# Altium PCB measurement_rev4.PcbDoc
Units mil, origin at the board's own origin, x right, y up, seen from the top; angles counter-clockwise.
Board outline 3939.96 x 3929 mil, 2 copper layers (Top Layer, Bottom Layer); 129 components, 97 nets, 440 pads, 205 vias.
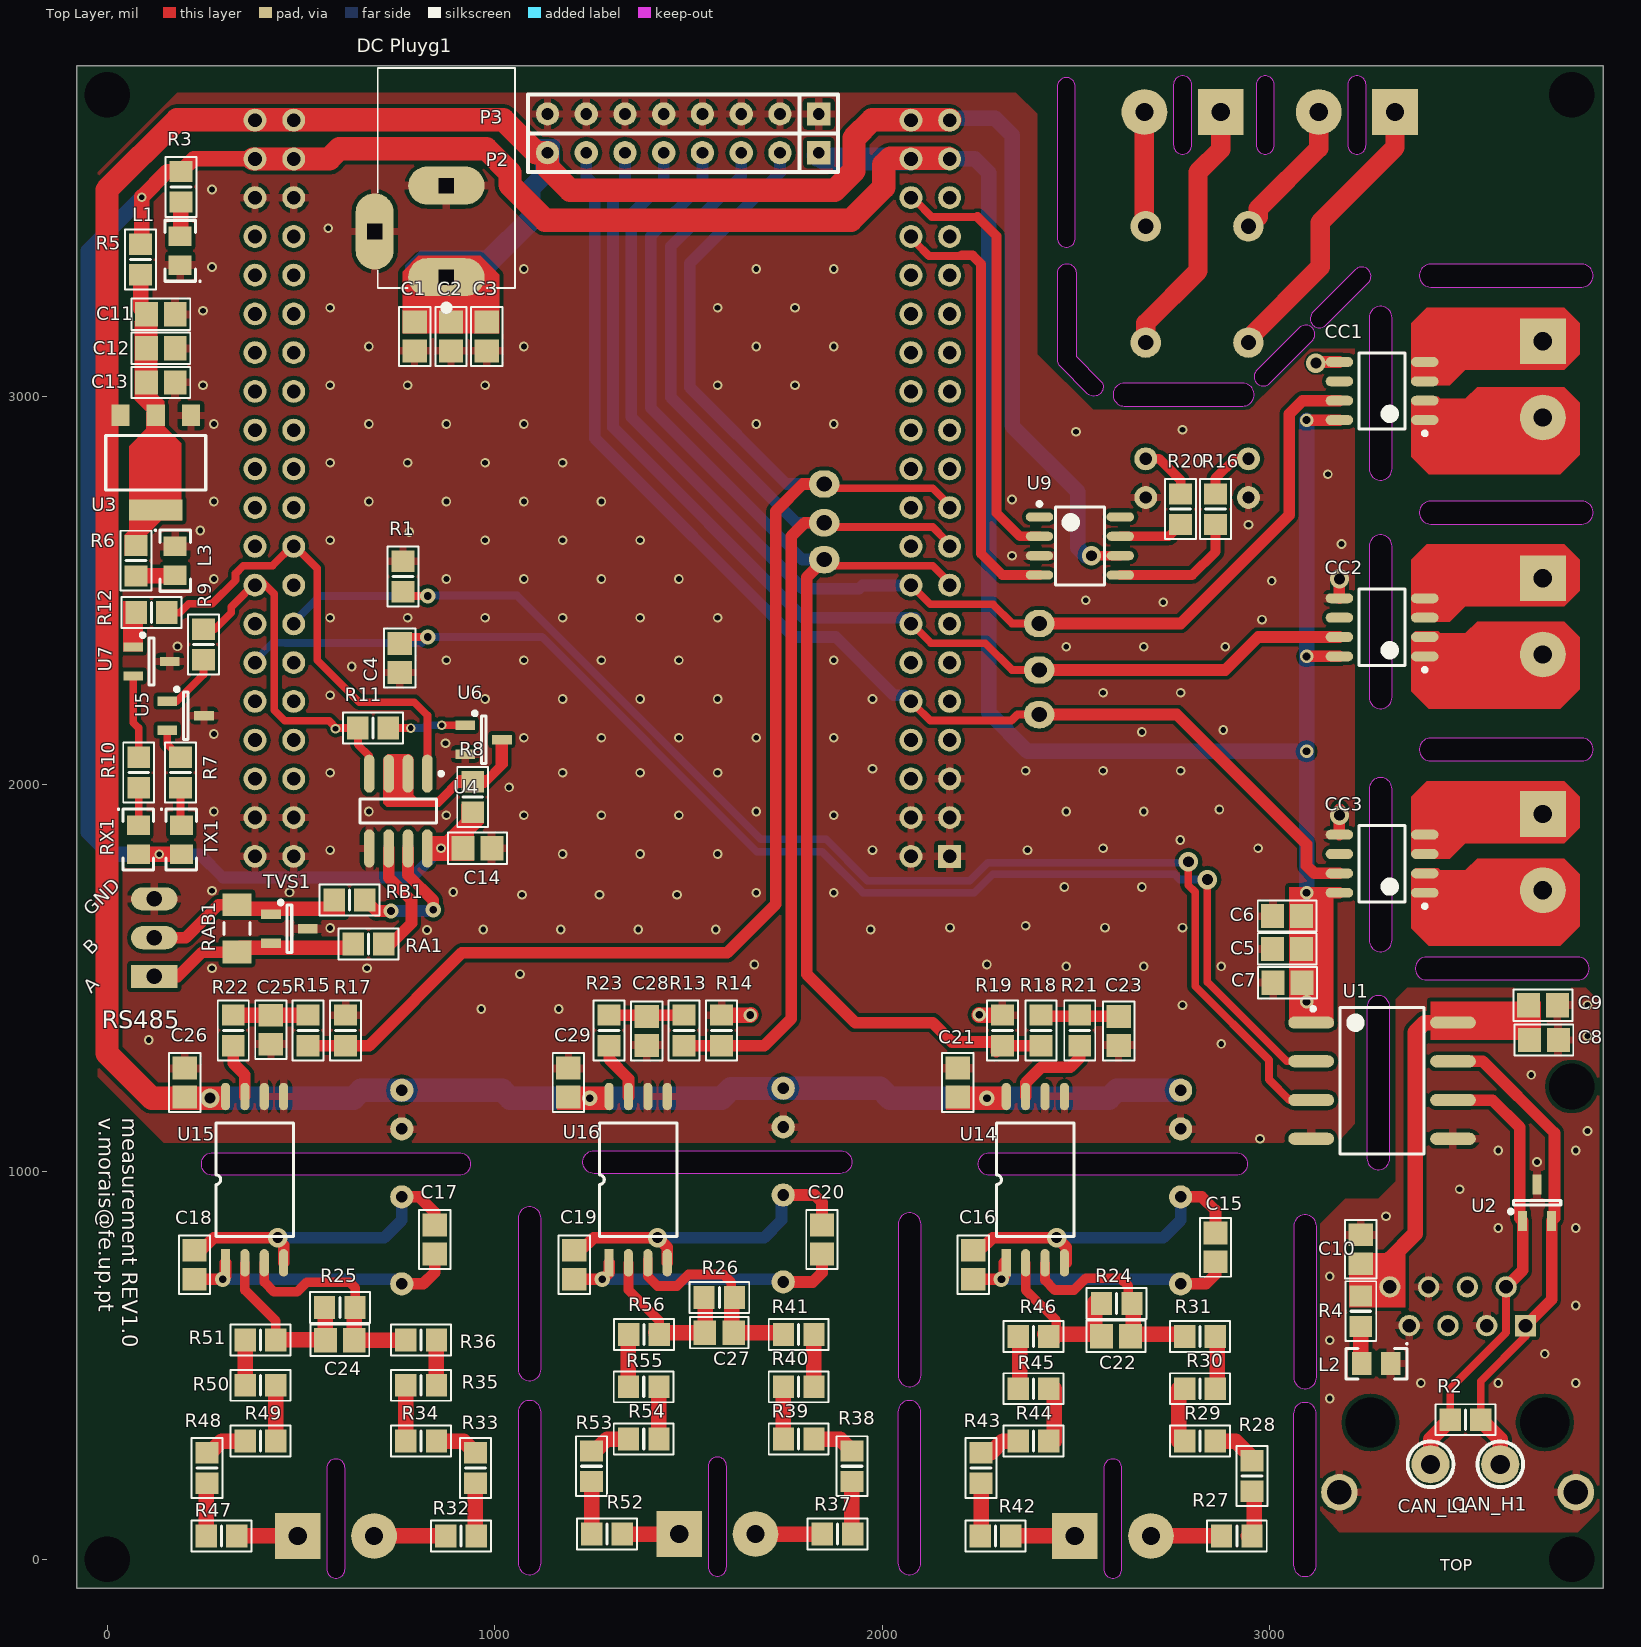
[diagram p0: Top Layer view]
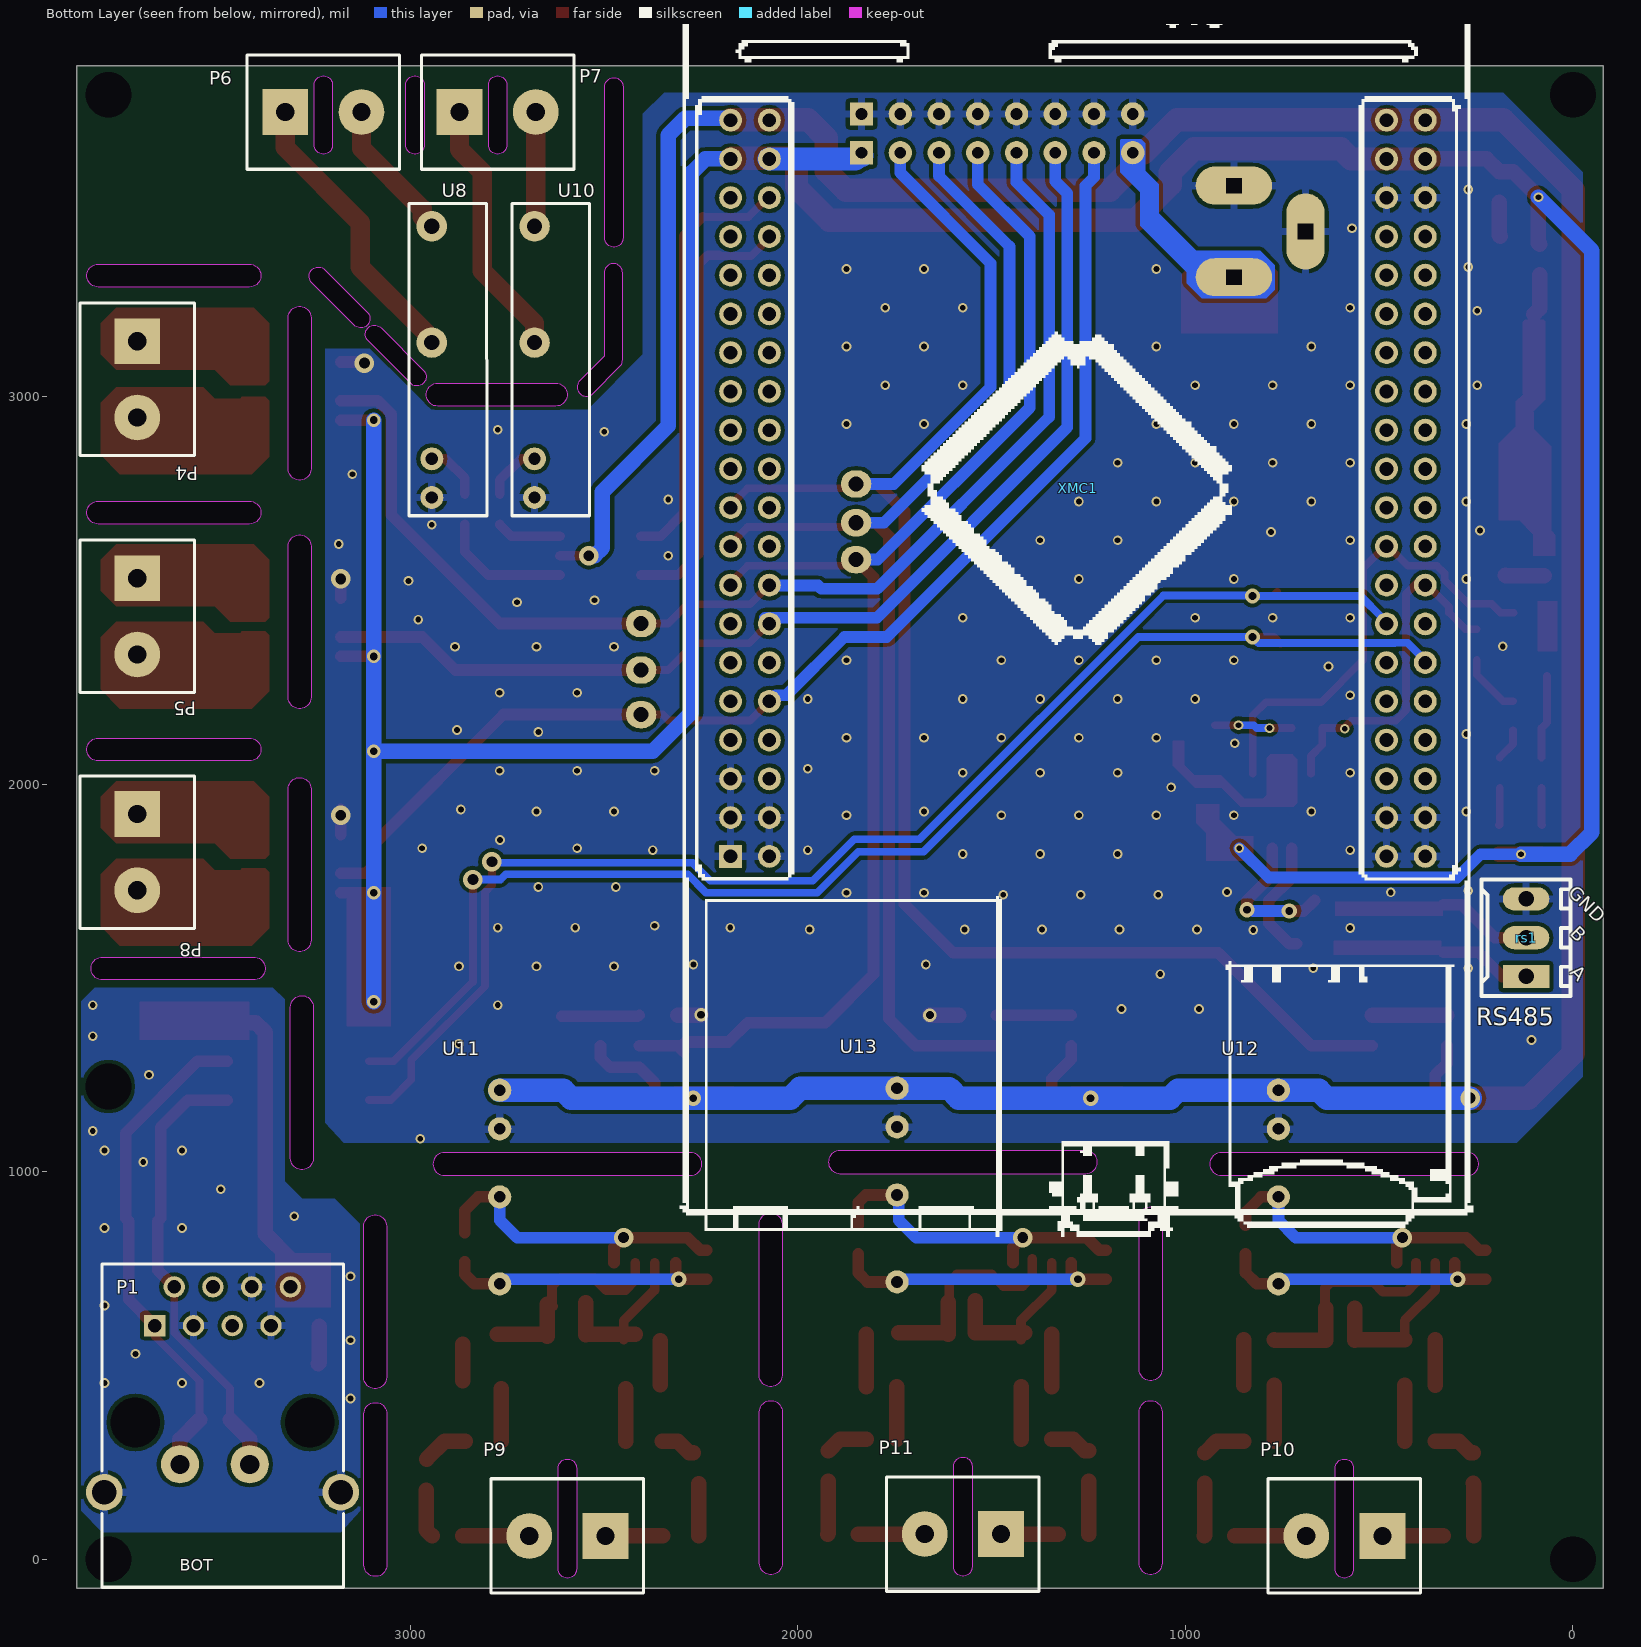
[diagram p1: Bottom Layer view, seen from below]

## Layer stack, top to bottom
Top Solder: solder mask 0.4, Solder Resist, Dk 3.5
Top Layer: signal copper 1.4
Dielectric 1: dielectric 12.6, FR-4, Dk 4.8
Bottom Layer: signal copper 1.4
Bottom Solder: solder mask 0.4, Solder Resist, Dk 3.5

## Board outline
-78.74,-75 805,-75 3220,-75 3861.22,-75 3861.22,3854 3220,3854 805,3854 -78.74,3854
cut-out: 2571.36,-25 ccw(c2595,-25) 2618.64,-25 2618.64,235 ccw(c2595,235) 2571.36,235
cut-out: 1550.73,-20 ccw(c1574.37,-20) 1598.01,-20 1598.01,240 ccw(c1574.37,240) 1550.73,240
cut-out: 566.36,-25 ccw(c590,-25) 613.64,-25 613.64,235 ccw(c590,235) 566.36,235
cut-out: 2966.57,3068.43 ccw(c2983.29,3051.71) 3000,3035 3109.6,3144.6 ccw(c3092.89,3161.32) 3076.17,3178.03
cut-out: 2964.79,3650 ccw(c2988.43,3650) 3012.06,3650 3012.06,3805 ccw(c2988.43,3805) 2964.79,3805
cut-out: 3201.36,3650 ccw(c3225,3650) 3248.64,3650 3248.64,3805 ccw(c3225,3805) 3201.36,3805
cut-out: 2751.36,3650 ccw(c2775,3650) 2798.64,3650 2798.64,3805 ccw(c2775,3805) 2751.36,3805
cut-out: 2451.36,3410 ccw(c2475,3410) 2498.64,3410 2498.64,3800 ccw(c2475,3800) 2451.36,3800
cut-out: 2459.65,3078.5 cw(c2476.36,3095.21) 2452.73,3095.21 2452.73,3320.21 cw(c2476.36,3320.21) 2500,3320.21 2500,3105 2563.08,3041.92 cw(c2546.36,3025.21) 2570,3025.21 cw(c2546.36,3025.21) 2529.65,3008.5
cut-out: 2930,2975.91 ccw(c2930,3005.46) 2930,3035 2625,3035 ccw(c2625,3005.46) 2625,2975.91
cut-out: 3256.72,2814.41 ccw(c3286.26,2814.41) 3315.8,2814.41 3315.8,3204.41 ccw(c3286.26,3204.41) 3256.72,3204.41
cut-out: 3256.72,2224.41 ccw(c3286.26,2224.41) 3315.8,2224.41 3315.8,2614.41 ccw(c3286.26,2614.41) 3256.72,2614.41
cut-out: 3061.09,-15 ccw(c3090.63,-15) 3120.17,-15 3120.17,375 ccw(c3090.63,375) 3061.09,375
cut-out: 3061.72,469.41 ccw(c3091.26,469.41) 3120.8,469.41 3120.8,859.41 ccw(c3091.26,859.41) 3061.72,859.41
cut-out: 2277.5,990.46 cw(c2277.5,1020) 2277.5,1049.54 2912.5,1049.54 cw(c2912.5,1020) 2942.04,1020 cw(c2912.5,1020) 2912.5,990.46
cut-out: 2040.46,-10 ccw(c2070,-10) 2099.54,-10 2099.54,380 ccw(c2070,380) 2040.46,380
cut-out: 2041.09,474.41 ccw(c2070.63,474.41) 2100.17,474.41 2100.17,864.41 ccw(c2070.63,864.41) 2041.09,864.41
cut-out: 1256.87,995.46 cw(c1256.87,1025) 1256.87,1054.54 1891.87,1054.54 cw(c1891.87,1025) 1921.41,1025 cw(c1891.87,1025) 1891.87,995.46
cut-out: 1060.46,-10 ccw(c1090,-10) 1119.54,-10 1119.54,380 ccw(c1090,380) 1060.46,380
cut-out: 1060.46,490 ccw(c1090,490) 1119.54,490 1119.54,880 ccw(c1090,880) 1060.46,880
cut-out: 272.5,990.46 cw(c272.5,1020) 272.5,1049.54 907.5,1049.54 cw(c907.5,1020) 937.04,1020 cw(c907.5,1020) 907.5,990.46
cut-out: 3805.59,2671.72 ccw(c3805.59,2701.26) 3805.59,2730.8 3415.59,2730.8 ccw(c3415.59,2701.26) 3415.59,2671.72
cut-out: 3805.59,2060.14 ccw(c3805.59,2089.69) 3805.59,2119.23 3415.59,2119.23 ccw(c3415.59,2089.69) 3415.59,2060.14
cut-out: 3256.72,1597.83 ccw(c3286.26,1597.83) 3315.8,1597.83 3315.8,1987.83 ccw(c3286.26,1987.83) 3256.72,1987.83
cut-out: 3795,1495 ccw(c3795,1524.54) 3795,1554.08 3405,1554.08 ccw(c3405,1524.54) 3405,1495
cut-out: 3805.59,3283.29 ccw(c3805.59,3312.83) 3805.59,3342.38 3415.59,3342.38 ccw(c3415.59,3312.83) 3415.59,3283.29
cut-out: 3111.57,3218.43 ccw(c3128.29,3201.71) 3145,3185 3254.6,3294.6 ccw(c3237.89,3311.32) 3221.17,3328.03
cut-out: 3250.91,1035 ccw(c3280.46,1035) 3310,1035 3310,1425 ccw(c3280.46,1425) 3250.91,1425

## Design rules (kind name [scope] priority, off if disabled: settings)
BoardOutlineClearance [All] p1: gap=7.87 ignorepadtopadclearanceinfootprint=FALSE except(15.75: Arc-SplitBarrior Arc-SplitContinuation Track-SplitBarrior Track-SplitContinuation SMDPad-SplitBarrior SMDPad-SplitContinuation THPad-SplitBarrior THPad-SplitContinuation Via-SplitBarrior Via-SplitContinuation Fill-SplitBarrior Fill-SplitContinuation Poly-SplitBarrior Poly-SplitContinuation Region-SplitBarrior Region-SplitContinuation Text-SplitBarrior Text-SplitContinuation)
Clearance [All] p1: gap=10 ignorepadtopadclearanceinfootprint=FALSE except(0: Arc-Hole Track-Hole SMDPad-Hole THPad-Hole Via-Hole Fill-Hole Poly-Hole Region-Hole Text-Hole)
HoleSize [All] p1: absolutevalues=TRUE maxlimit=248.03 minlimit=7.87 maxpercent=80.000 minpercent=20.000
MinimumAnnularRing [All] p1: minimumring=3
MinimumSolderMaskSliver [All] p1: minsoldermaskwidth=3.94
PolygonConnect PolygonConnect_1 [All] p1: thpad.connectstyle=Relief thpad.reliefconductorwidth=20 thpad.reliefentries=4 thpad.polygonreliefangle="90 Angle" thpad.airgapwidth=10 smdpad.connectstyle=Relief smdpad.reliefconductorwidth=20 smdpad.reliefentries=4 smdpad.polygonreliefangle="90 Angle" smdpad.airgapwidth=10 via.connectstyle=Direct via.reliefconductorwidth=20 via.reliefentries=4 via.polygonreliefangle="90 Angle" via.airgapwidth=10
RoutingCorners [All] p1: cornerstyle=Round minsetback=100 maxsetback=100
RoutingVias [All] p1: holewidth=19.68 width=39.37 viastyle="Through Hole" minholewidth=7.87 minwidth=17.72 maxholewidth=39.37 maxwidth=78.74
SilkToSilkClearance [All] p1: silktosilkclearance=3.94
SilkToSolderMaskClearance [IsPad] p1: minsilkscreentomaskgap=3.94 clearancetoexposedcopper=TRUE
SolderMaskExpansion [All] p1: expansion=4
Width [All] p1: maxlimit=100 minlimit=3.5 preferedwidth=15
25 further rules are at their usual default settings.

## Components (designator, comment, footprint, x,y, rotation, side; value= is the part's Value field where it differs from the comment)
C1 "C 100nF 0805 MLCC 25V X5R" CAPC_0805 793,3156 r90 top
C2 "C 1uF 0805 MLCC 25V X5R" CAPC_0805 887,3156 r90 top
C3 "C 10uF 0805 MLCC 25V X5R" CAPC_0805 979,3156 r90 top
C4 "Capacitor" CAPC_0805 755,2326 r90 top value="15 pF"
C5 "Capacitor" CAPC_0805 3045,1575 r0 top value=1u
C6 "Capacitor" CAPC_0805 3045,1660 r0 top value="0.1 uF"
C7 "Capacitor" CAPC_0805 3046,1488 r0 top value="0.01 uF"
C8 "Capacitor" CAPC_0805 3707.4,1340 r180 top value=1uF
C9 "Capacitor" CAPC_0805 3705,1430 r180 top value="0.1 uF"
C10 "Capacitor" CAPC_0805 3235,800 r270 top value="0.01 uF"
C11 "C 100nF 0805 MLCC 25V X5R" CAPC_0805 138,3213 r180 top
C12 "C 1uF 0805 MLCC 25V X5R" CAPC_0805 138,3125 r180 top
C13 "C 10uF 0805 MLCC 25V X5R" CAPC_0805 138,3037 r180 top
C14 "C 100nF 0805 MLCC 25V X5R" CAPC_0805 955,1835 r180 top
C15 "C 10uF 0805 MLCC 25V X5R" CAPC_0805 2860,805 r270 top
C16 "C 10uF 0805 MLCC 25V X5R" CAPC_0805 2235,760 r270 top
C17 "C 10uF 0805 MLCC 25V X5R" CAPC_0805 845,825 r270 top
C18 "C 10uF 0805 MLCC 25V X5R" CAPC_0805 225,760 r270 top
C19 "C 10uF 0805 MLCC 25V X5R" CAPC_0805 1205,760 r270 top
C20 "C 10uF 0805 MLCC 25V X5R" CAPC_0805 1844.37,825 r270 top
C21 "C 10uF 0805 MLCC 25V X5R" CAPC_0805 2195,1230 r270 top
C22 "C 1uF 0805 MLCC 50V X5R" CAPC_0805 2603.59,575.54 r180 top
C23 "C 10nF 0805 MLCC 50V X7R" CAPC_0805 2610,1363.59 r90 top
C24 "C 1uF 0805 MLCC 50V X5R" CAPC_0805 600,565 r180 top
C25 "C 10nF 0805 MLCC 50V X7R" CAPC_0805 422.21,1366.41 r90 top
C26 "C 10uF 0805 MLCC 25V X5R" CAPC_0805 200,1230 r270 top
C27 "C 1uF 0805 MLCC 50V X5R" CAPC_0805 1579.37,585 r180 top
C28 "C 10nF 0805 MLCC 50V X7R" CAPC_0805 1392.21,1363.59 r90 top
C29 "C 10uF 0805 MLCC 25V X5R" CAPC_0805 1190,1230 r270 top
CAN_H1 "testePoint" "PAD 2.5MM - FURO 1.25MM" 3595,245 r90 top
CAN_L1 "testePoint" "PAD 2.5MM - FURO 1.25MM" 3415,245 r90 top
CC1 "IC CC 30A SO-8" CC6303_SOP8 3290,3015 r180 top
CC2 "IC CC 30A SO-8" CC6303_SOP8 3290,2405 r180 top
CC3 "IC CC 30A SO-8" CC6303_SOP8 3290,1795 r180 top
"DC Pluyg1" "DC PLUG" "DC Plug" 875,3308.78 r90 top
L1 "Green" CD2012-0805 188,3377 r270 top
L2 "Green" CD2012-0805 3275,505 r0 top
L3 "Green" CD2012-0805 175,2577 r90 top
P1 "61500814221" 61500814221 3485,345 r180 bottom
P2 "P 8p 2.54 SR DW 8P" "Header 8x1 8.5mm" 1836,3630 r180 top
P3 "P 8p 2.54 SR DW 8P" "Header 8x1 8.5mm" 1836,3730 r180 top
P4 "P 2p 5mm" connector1x2_parafuso 3705,3045 r270 bottom
P5 "P 2p 5mm" connector1x2_parafuso 3705,2433.43 r270 bottom
P6 "P 2p 5mm" connector1x2_parafuso 3225,3735 r180 bottom
P7 "P 2p 5mm" connector1x2_parafuso 2775,3735 r180 bottom
P8 "P 2p 5mm" connector1x2_parafuso 3705,1825 r270 bottom
P9 "P 2p 5mm" connector1x2_parafuso 2595,60 r0 bottom
P10 "P 2p 5mm" connector1x2_parafuso 590,60 r0 bottom
P11 "P 2p 5mm" connector1x2_parafuso 1574.37,65 r0 bottom
R1 "49.9" RESC_0805 763,2536 r90 top
R2 "N.A." RESC_0805 3505,360 r180 top
R3 "220" RESC_0805 190,3542 r270 top
R4 "R 470 1/8W 0805 1%" RESC_0805 3235,640 r270 top value=470
R5 "R 0R 1/8W 0805" RESC_0805 86,3354 r90 top
R6 "220" RESC_0805 74,2577 r90 top
R7 "R 470 1/8W 0805" RESC_0805 189,2030 r90 top
R8 "R 10k 1/8W 0805" RESC_0805 943,1967 r270 top
R9 "R 10k 1/8W 0805" RESC_0805 248,2361 r90 top
R10 "R 470 1/8W 0805" RESC_0805 81,2030 r90 top
R11 "R 10k 1/8W 0805" RESC_0805 686,2145 r0 top
R12 "R 10k 1/8W 0805" RESC_0805 114,2443 r0 top
R13 "R 5k1 1/8W 0805 .1%" RESC_0805 1488.33,1365 r90 top
R14 "R 7k5 1/8W 0805 .1%" RESC_0805 1585,1365 r270 top
R15 "R 5k1 1/8W 0805 .1%" RESC_0805 518.33,1365 r90 top
R16 "Resistor" RESC_0805 2860,2710 r90 top
R17 "R 7k5 1/8W 0805 .1%" RESC_0805 615,1365 r270 top
R18 "R 5k1 1/8W 0805 .1%" RESC_0805 2409.82,1365 r90 top
R19 "R 7k5 1/8W 0805 .1%" RESC_0805 2310,1365 r270 top
R20 "Resistor" RESC_0805 2770,2710 r90 top
R21 "R 330 1/8 0805 .1%" RESC_0805 2509.64,1365 r90 top
R22 "R 330 1/8 0805 .1%" RESC_0805 325,1365 r90 top
R23 "R 330 1/8 0805 .1%" RESC_0805 1295,1365 r90 top
R24 "R 560 1/8W 0805 .1%" RESC_0805 2605,660 r180 top
R25 "R 560 1/8W 0805 .1%" RESC_0805 600,650 r180 top
R26 "R 560 1/8W 0805 .1%" RESC_0805 1579.37,675 r180 top
R27 "R 100k 1/8W 0805 .1%" RESC_0805 2915,60 r0 top
R28 "R 100k 1/8W 0805 .1%" RESC_0805 2954.37,215 r90 top
R29 "R 100k 1/8W 0805 .1%" RESC_0805 2820,305 r180 top
R30 "R 100k 1/8W 0805 .1%" RESC_0805 2820,440 r0 top
R31 "R 100k 1/8W 0805 .1%" RESC_0805 2820,575 r180 top
R32 "R 100k 1/8W 0805 .1%" RESC_0805 912.46,60 r0 top
R33 "R 100k 1/8W 0805 .1%" RESC_0805 949.86,235 r90 top
R34 "R 100k 1/8W 0805 .1%" RESC_0805 810,305 r180 top
R35 "R 100k 1/8W 0805 .1%" RESC_0805 810,448.93 r0 top
R36 "R 100k 1/8W 0805 .1%" RESC_0805 810,566.07 r180 top
R37 "R 100k 1/8W 0805 .1%" RESC_0805 1884.37,65 r0 top
R38 "R 100k 1/8W 0805 .1%" RESC_0805 1921.77,240 r90 top
R39 "R 100k 1/8W 0805 .1%" RESC_0805 1784.37,310 r180 top
R40 "R 100k 1/8W 0805 .1%" RESC_0805 1784.37,445 r0 top
R41 "R 100k 1/8W 0805 .1%" RESC_0805 1784.37,580 r180 top
R42 "R 100k 1/8W 0805 .1%" RESC_0805 2292.4,60 r180 top
R43 "R 100k 1/8W 0805 .1%" RESC_0805 2255,235 r90 top
R44 "R 100k 1/8W 0805 .1%" RESC_0805 2390,305 r0 top
R45 "R 100k 1/8W 0805 .1%" RESC_0805 2390,440 r180 top
R46 "R 100k 1/8W 0805 .1%" RESC_0805 2390,575 r0 top
R47 "R 100k 1/8W 0805 .1%" RESC_0805 294.86,60 r180 top
R48 "R 100k 1/8W 0805 .1%" RESC_0805 257.46,235 r90 top
R49 "R 100k 1/8W 0805 .1%" RESC_0805 395,305 r0 top
R50 "R 100k 1/8W 0805 .1%" RESC_0805 395,448.93 r180 top
R51 "R 100k 1/8W 0805 .1%" RESC_0805 395,566.07 r0 top
R52 "R 100k 1/8W 0805 .1%" RESC_0805 1289.37,65 r180 top
R53 "R 100k 1/8W 0805 .1%" RESC_0805 1249.37,240 r90 top
R54 "R 100k 1/8W 0805 .1%" RESC_0805 1384.37,310 r0 top
R55 "R 100k 1/8W 0805 .1%" RESC_0805 1384.37,445 r180 top
R56 "R 100k 1/8W 0805 .1%" RESC_0805 1385,580 r0 top
RA1 "10" RESC_0805 674,1588 r0 top
RAB1 "120" RESC_1206 335,1628 r90 top
RB1 "10" RESC_0805 625,1701 r0 top
rs1 "con-phoenix-3" "molex 3P" 121,1604 r90 bottom
RX1 "Green" CD2012-0805 80,1857 r90 top
TVS1 "Diode_TVS_Array" SOT23-3 470,1627 r0 top value=CDSOT23-SM712
TX1 "Green" CD2012-0805 191,1857 r90 top
U1 "ISO1050DUBR" DUB8_M 3290,1235 r0 top
U2 "Diode_TVS_Array" SOT23-3 3690,920 r90 top value=SM24CANB-02HTG
U3 "IC DCDC 3V3 SOT223" PG-SOT-223 125,2830 r180 top value=IFX1117ME3V3
U4 "IC RS485" NSO8_M 751,1931 r270 top value=SN65HVD75DR
U5 "IC MOS P 20V 1.5A" SOT23-3 202,2177 r0 top value=ntr1p02
U6 "IC MOS N 100V 170MA" SOT23-3 971,2115 r0 top value=BSS123
U7 "IC MOS P 20V 1.5A" SOT23-3 114,2317 r0 top value=ntr1p02
U8 "relay G6DN" "Relay - G6DN" 2945,2840 r90 bottom
U9 "IC DUAL MOS DRIVER MIC4127" SOIC-MIC4126 2510,2615 r0 top
U10 "relay G6DN" "Relay - G6DN" 2680,2840 r90 bottom
U11 "IC CC/CC 1W 5V" DC/DC_ISO 2770,1210.59 r270 bottom
U12 "IC CC/CC 1W 5V" DC/DC_ISO 760,1210.59 r270 bottom
U13 "IC CC/CC 1W 5V" DC/DC_ISO 1744.37,1215.59 r270 bottom
U14 "IC AmpIso BIPOL AMC1200" SOIC8 2320,765 r90 top
U15 "IC AmpIso BIPOL AMC1200" SOIC8 305,765 r90 top
U16 "IC AmpIso BIPOL AMC1200" SOIC8 1295,765 r90 top
XMC1 "IC XMC4500 Relax LITE" XMC4500 1277.46,2764 r0 bottom

## Footprints (in the part's own frame and the unit in brackets; to place one, negate y for a bottom-side part, rotate by r counter-clockwise, add the part's x,y. Pads: shape width x height; smd on the part's side, far side on the other; paste and mask are expansions set on the pad)
61500814221 [mm] "Modular Jack Horizontal Shielded 8P8C Tab Down"
  rect 1.4x1.4 hole 0.9: 1(-4.445,6.55)
  round 1.4 hole 0.9: 2(-3.175,9.09) 3(-1.905,6.55) 4(-0.635,9.09) 5(0.635,6.55) 6(1.905,9.09) 7(3.175,6.55) 8(4.445,9.09)
  round 3.15 hole 3.25 unplated: MH1(-5.715,0.2) MH2(5.715,0.2)
  round 2.4 hole 1.6: S1(-7.75,-4.37) S2(7.75,-4.37)
  silkscreen extent -7.92,-10.6 7.92,10.6, body extent -7.9,-10.6 7.9,10.6, height 13.7
CAPC_0805 [mm] "Chip Capacitor, Body 2.0x1.3mm, IPC Low Density"
  rect 1.5x1.6 smd: 1(-0.95,0) 2(0.95,0)
  silkscreen extent -1.93,-1.03 1.93,1.03, body extent -1.1,-0.72 1.1,0.72, height 1.1
CC6303_SOP8 [mm] "SOP, 8-Leads, Body 4,90x3,91mm, Pitch 1,27mm, IPC Medium Density"
  oval 1.8x0.65 smd: 1(-2.8,1.905) 2(-2.8,0.635) 3(-2.8,-0.635) 4(-2.8,-1.905) 5(2.8,-1.905) 6(2.8,-0.635) 7(2.8,0.635) 8(2.8,1.905)
  silkscreen extent -2.93,-2.5 1.5,2.9, body extent -1.9,-2.5 1.9,2.5, height 2.65
CD2012-0805 [mm] "Chip Diode; Body 2.0 x 1.3 mm (LxW typ)"
  rect 1.3x1.5 smd: A(-0.95,0) C(0.95,0)
  silkscreen extent -2,-1 2.04,1.34, body extent -1.05,-0.67 1.05,0.68, height 0.9
connector1x2_parafuso [mm] "Connector; Header; 2 Position"
  rect 3x3 hole 1.2: 1(-2.5,0)
  round 3 hole 1.2: 2(2.5,0)
  silkscreen extent -5,-3.75 5,3.75, body extent -4.92,-4.53 5.68,4.47, height 14.6
"DC Plug" [mm] "5.5mmx2.1mm"
  oval 2.5x5 hole 1 square: 1(0,0) 2(6,0)
  oval 5x2.5 hole 1 square: 3(3,4.7)
  silkscreen extent -2.2,-4.5 13.7,4.5, body extent -0.67,-4.69 13.73,4.71, height 11.05
DC/DC_ISO [mil]
  round 60 hole 30: 1(0,0) 2(100,0) 3(275.59,0) 4(500,0)
  body extent -54,-149 572,80, height 315
DUB8_M [mm] "SOP, 8-Leads, Body 9.5x6.62mm, Pitch 2.54mm, IPC Low Density"
  oval 3x0.8 smd: 1(-4.65,3.81) 2(-4.65,1.27) 3(-4.65,-1.27) 4(-4.65,-3.81) 5(4.65,-3.81) 6(4.65,-1.27) 7(4.65,1.27) 8(4.65,3.81)
  silkscreen extent -4.65,-4.8 2.75,4.83, body extent -3.33,-4.77 3.33,4.77, height 4.85
"Header 8x1 8.5mm" [mil] "Stackable 8 pin header"
  rect 60x60 hole 30: 1(0,0)
  round 60 hole 30: 2(100,0) 3(200,0) 4(300,0) 5(400,0) 6(500,0) 7(600,0) 8(700,0)
  silkscreen extent -50,-50 750,50, body extent -50,-50 750,50, height 335
"molex 3P" [mil]
  rect 60x120 hole 40: 1(-100,0)
  oval 60x120 hole 40: 2(0,0) 3(100,0)
  silkscreen extent -150,-115 150,115, body extent -151,-124 149,126, height 413
NSO8_M [mm] "SOIC, 8-Leads, Body 4.9x3.9mm, Pitch 1.27mm, IPC Low Density"
  oval 2.5x0.7 smd: 1(-2.45,1.905) 2(-2.45,0.635) 3(-2.45,-0.635) 4(-2.45,-1.905) 5(2.45,-1.905) 6(2.45,-0.635) 7(2.45,0.635) 8(2.45,1.905)
  silkscreen extent -2.57,-2.5 0.8,2.93, body extent -2,-2.5 2,2.5, height 1.75
"PAD 2.5MM - FURO 1.25MM" [mm]
  round 2.5 hole 1.25: 1(0,0)
  silkscreen extent -1.5,-1.5 1.5,1.5, body extent -1.27,-1.27 1.27,1.27, height 4.57
PG-SOT-223 [mm]
  rect 1.2x1.4 smd: 1(-2.311,-3.099) 2(0,-3.099) 3(2.311,-3.099)
  rect 3.5x1.4 smd: 4(0,3.099)
  silkscreen extent -3.28,-1.78 3.28,1.78, body extent -3.25,-3.5 3.25,3.5, height 1.7
"Relay - G6DN" [mm]
  round 1.5 hole 0.8: 1(-2.54,0)
  round 1.5 hole 0.8 paste+0: 2(0,0)
  round 2 hole 1: 3(7.62,0) 4(15.24,0)
  silkscreen extent -3.73,-3.62 16.74,1.49, body extent -3.33,-3.53 16.51,1.42, height 13
RESC_0805 [mm] "Chip Resistor, Body 2.0x1.3mm, IPC Low Density"
  rect 1.4x1.5 smd: 1(-1,0) 2(1,0)
  silkscreen extent -1.96,-1.01 1.96,1.01, body extent -1.07,-0.7 1.08,0.7, height 0.65
RESC_1206 [mm] "Chip Resistor, Body 3.2x1.6mm, IPC Low Density"
  rect 1.5x1.9 smd: 1(-1.55,0) 2(1.55,0)
  silkscreen extent -0.4,-0.85 0.4,0.85, body extent -1.68,-0.87 1.68,0.87, height 0.71
SOIC8 [mm]
  rect 1.8x0.6 smd: 1(0,0)
  oval 1.8x0.6 smd: 2(0,-1.27) 3(0,-2.54) 4(0,-3.81) 5(10.9,-3.81) 6(10.9,-2.54) 7(10.9,-1.27) 8(10.9,0)
  silkscreen extent 1.73,-4.44 9.17,0.64, body extent 1.7,-4.52 9.22,0.69, height 3
SOIC-MIC4126 [mm] "SOIC, 8-Leads, Body 5,08x3,95mm, Pitch 1,27mm, IPC Medium Density"
  oval 1.8x0.6 smd: 1(-2.65,1.905) 2(-2.65,0.635) 3(-2.65,-0.635) 4(-2.65,-1.905) 5(2.65,-1.905) 6(2.65,-0.635) 7(2.65,0.635) 8(2.65,1.905)
  silkscreen extent -2.77,-2.55 1.6,2.88, body extent -2.83,-2.55 2.83,2.55, height 1.55
SOT23-3 [mm] "SOT23, 3"
  rect 1.3x0.6 smd mask+0.05: 1(-1.2,0.95) 2(-1.2,-0.95) 3(1.2,0)
  silkscreen extent -0.7,-1.55 0.15,1.85, body extent -1.32,-1.46 1.15,1.46, height 1
XMC4500 [mm]
  rect 1.5x1.5 hole 0.9: 1(22.77,24.13)
  round 1.5 hole 0.9: 2(22.77,21.59) 3(22.77,19.05) 4(22.77,16.51) 5(22.77,13.97) 6(22.77,11.43) 7(22.77,8.89) 8(22.77,6.35) 9(22.77,3.81) 10(22.77,1.27) 11(22.77,-1.27) 12(22.77,-3.81) 13(22.77,-6.35) 14(22.77,-8.89) 15(22.77,-11.43) 16(22.77,-13.97) 17(22.77,-16.51) 18(22.77,-19.05) 19(22.77,-21.59) 20(22.77,-24.13) 21(20.23,-24.13) 22(20.23,-21.59) 23(20.23,-19.05) 24(20.23,-16.51) 25(20.23,-13.97) 26(20.23,-11.43) 27(20.23,-8.89) 28(20.23,-6.35) 29(20.23,-3.81) 30(20.23,-1.27) 31(20.23,1.27) 32(20.23,3.81) 33(20.23,6.35) 34(20.23,8.89) 35(20.23,11.43) 36(20.23,13.97) 37(20.23,16.51) 38(20.23,19.05) 39(20.23,21.59) 40(20.23,24.13) 41(-20.23,24.13) 42(-20.23,21.59) 43(-20.23,19.05) 44(-20.23,16.51) 45(-20.23,13.97) 46(-20.23,11.43) 47(-20.23,8.89) 48(-20.23,6.35) 49(-20.23,3.81) 50(-20.23,1.27) 51(-20.23,-1.27) 52(-20.23,-3.81) 53(-20.23,-6.35) 54(-20.23,-8.89) 55(-20.23,-11.43) 56(-20.23,-13.97) 57(-20.23,-16.51) 58(-20.23,-19.05) 59(-20.23,-21.59) 60(-20.23,-24.13) 61(-22.77,-24.13) 62(-22.77,-21.59) 63(-22.77,-19.05) 64(-22.77,-16.51) 65(-22.77,-13.97) 66(-22.77,-11.43) 67(-22.77,-8.89) 68(-22.77,-6.35) 69(-22.77,-3.81) 70(-22.77,-1.27) 71(-22.77,1.27) 72(-22.77,3.81) 73(-22.77,6.35) 74(-22.77,8.89) 75(-22.77,11.43) 76(-22.77,13.97) 77(-22.77,16.51) 78(-22.77,19.05) 79(-22.77,21.59) 80(-22.77,24.13)
  silkscreen extent -25.92,-53.34 26.1,49.07, body extent -24.04,-25.4 24.04,25.4, height 8.5

## Part data
C1 C11 C14: library part "Capacitor SMD", "MULTILAYER CERAMIC CAPACITORS MLCC - SMD/SMT 100NF 50V 0805 ROHS", LCSC PART #=C49678
C2 C12: library part "Capacitor SMD", "MULTILAYER CERAMIC CAPACITORS MLCC - SMD/SMT 1UF 50V 0805 ROHS", LCSC PART #=C28323
C3 C13 C15 C16 C17 C18 C19 C20 C21 C26 C29: library part "Capacitor SMD", "Capacitores de cerâmica multicamada MLCC - SMD/SMT 10uF 25V X5R +/-10% 0805 Gen Purp", LCSC PART #=C15850, Mouser VPN=963-TMK212BBJ106KG-T, Price=0,162
C4: LCSC PART #=C1794
C5 C8: LCSC PART #=C28323
C6 C9: LCSC PART #=C49678
C7 C10: LCSC PART #=C1710
C22 C24 C27: library part "Capacitor SMD", "Capacitores de cerâmica multicamada MLCC - SMD/SMT 0805 50V 1uF 20% X5R", LCSC PART #=C28323, Mouser VPN=963-UMK212BJ105MG-T, Price=0,153
C23 C25 C28: library part "Capacitor SMD", "Capacitores de cerâmica multicamada MLCC - SMD/SMT 10nF 50V X7R 10%", LCSC PART #=C1710, Mouser VPN=603-CC805KRX7R9BB103, Price=0,099
CC1 CC2 CC3: library part Current_Sensor_cc6303, "Sensores de Corrente de Montagem de Painel Hall Effect IC LF 30A 66 mV/A", LCSC PART #=C163283, Mouser VPN=630-ACHS-7123-000E, Price=3,47
L1 L2 L3 RX1 TX1: library part LED_GREEN, "LED 2X1.2MM 570NM GN WTR CLR SMD", LCSC PART #=C84256, Manufacturer=Kingbright, MPN=APT2012CGCK, Vendor=Digikey, VPN=754-1127-1-ND
P1: "Modular Jack Horizontal Shielded 8P8C Tab Down WR-MJ", Rated Current="1.5 A", Withstanding Voltage="1000 VAC", Working Voltage="120 VAC", ComponentLink1Description=Manufacturer, ComponentLink1URL=http://www.we-online.de, ComponentLink2Description=Datasheet, ComponentLink2URL=http://katalog.we-online.com/em/datasheet/61500814221.pdf, Entrance=Horizontal, Part Number=61500814221, Pin Number=8P8C, Port=1x1, Published Date="September 2017", Publisher="Wurth Elektronik"
P2 P3: library part jumper_8p, "Distribuidores e Alojamento de Fios CGrid Hrd SRDW THo le 8ckt", Mouser VPN=538-87937-0800, Price=0,621
P4 P5 P6 P7 P8 P9 P10 P11: library part gen_purpose_conn_1x2, "Bloques de terminales de PCB de perfil estándar RS de 5,0 mm", Price=0,24, RS VPN=896-6696
R1: library part R2, "Thick film resistor, SMD 0402, 1/16W, 1%", LCSC PART #=C17720, Manufacturer=Generic
R2: library part R2, "Thick film resistor, SMD 0402, 1/16W, 1%", Manufacturer=Generic
R3 R6: library part R2, "Thick film resistor, SMD 0402, 1/16W, 1%", LCSC PART #=C17557, Manufacturer=Generic
R4: library part R2, "Resistores de Filme Espesso - SMD 1/8Watt 470ohms 1% Commercial Use", LCSC PART #=C17710, Manufacturer=Generic
R5: library part Resistor, "Resistores de Filme Fino - SMD 0 ohm", LCSC PART #=C17477
R7 R10: library part Resistor, "CHIP RESISTOR - SURFACE MOUNT 470OHMS ±1% 1/8W 0805 ROHS", LCSC PART #=C17710
R8 R9 R11 R12: library part Resistor, "CHIP RESISTOR - SURFACE MOUNT 10KOHMS ±1% 1/8W 0805 ROHS", LCSC PART #=C17414
R13 R15 R18: library part Resistor, "Resistores de Filme Fino - SMD 0805 5.1Kohm 1/8W .1% 25ppm", LCSC PART #=C27834, Mouser VPN=667-ERA-6AEB512V, Price=0,324
R14 R17 R19: library part Resistor, "Resistores de Filme Fino - SMD 7.5K OHM .1% 25ppm", LCSC PART #=C17807, Mouser VPN=66-PCF08C7.5KB, Price=0,135
R21 R22 R23: library part Resistor, "Resistores de Filme Fino - SMD CPF 0805 330R 0.1% 25PPM 1K RL", LCSC PART #=C17630, Mouser VPN=279-CPF0805B330RE1, Price=0,126
R24 R25 R26: library part Resistor, "Resistores de Filme Fino - SMD 1/8W 3.6K ohm .1% 25ppm", LCSC PART #=C28636, Mouser VPN=667-ERJ-PB6B5600V, Price=0,324
R27 R28 R29 R30 R31 R32 R33 R34 R35 R36 R37 R38 R39 R40 R41 R42 R43 R44 R45 R46 R47 R48 R49 R50 R51 R52 R53 R54 R55 R56: library part Resistor, "Resistores de Filme Fino - SMD 100 Kohm .1% 0805 25PPM", LCSC PART #=C17407, Mouser VPN=284-APC0805B100KN, Price=0,126
RA1 RB1: library part R2, "CHIP RESISTOR - SURFACE MOUNT 10OHMS ±1% 1/8W 0805 ROHS", LCSC PART #=C17415, Manufacturer=Generic
RAB1: library part R2, "CHIP RESISTOR - SURFACE MOUNT 120OHMS ±1% 1/4W 1206 ROHS", LCSC PART #=C17909, Manufacturer=Generic
TVS1: "DIODES - ESD SOT-23 ROHS", LCSC PART #=C404012
U1: "Isolated CAN Transceiver, -55 to 105 degC, 8-pin SOP (DUB), Green (RoHS & no Sb/Br)", LCSC PART #=C16428
U2: LCSC PART #=C151237
U3: library part Component_1, "LINEAR VOLTAGE REGULATORS SOT-223 ROHS", LCSC PART #=C91389
U4: library part MAX481CSA, "RS-485 & RS-422 1/1 20MBPS 3V ~ 3.6V SOIC-8_150MIL ROHS", LCSC PART #=C57928, Code_IPC=SOIC127P600-8, Code_JEDEC=MS-012-AA, ComponentLink1Description="Manufacturer Link", ComponentLink1URL=http://www.maxim-ic.com/, ComponentLink2Description=Datasheet, ComponentLink2URL=http://pdfserv.maxim-ic.com/en/ds/MAX1487-MAX491.pdf, DatasheetVersion=Feb-1996, LatestRevisionDate=13-Apr-2006, LatestRevisionNote="IPC-7351 Footprint Added.", PackageDescription="8-Pin Small Outline Integrated Circuit 1.27 mm Pitch", PackageReference=NSO8, Published=16-Jan-2001, Publisher="Altium Limited"
U5 U7: library part MOSFET_P, "MOSFET P TRENCH 20V 1A 2.3V @ 250UA 180 M? @ 1.5A,10V SOT-23(SOT-23-3) ROHS", LCSC PART #=C129192
U6: library part MOSFET, "MOSFET N TRENCH 100V 170MA 2V @ 1MA 6 ? @ 170MA,10V SOT-23(SOT-23-3) ROHS", LCSC PART #=C79015
U8 U10: library part "Relay - G6DN"
U9: library part MOS_DRIVER-MIC4126, "Drivers de portas 1.5A Dual High Speed MOSFET Driver with Low Thermal Impedance", LCSC PART #=C20551, Equivalente=TC4427AEOA, Mouser VPN=998-MIC4126YME, Price=0,756
U11 U12 U13: library part DC/DC_ISO, "Conversores CC/CC com isolação 1W 5Vin 5Vout 200mA SIP7", Mouser VPN=919-RFB-0505S, Price=1,4
U14 U15 U16: library part AMC1200, "Amplificadores de isolamento 4kV peak Iso Amp", LCSC PART #=C79905, Mouser VPN=595-AMC1200BDWVR, Price=4,62
XMC1: library part XMC4500, "\"  KIT_XMC45_RELAX_LITE_V1 -  Evaluation Board, XMC4500 MCU, Detachable On-Board Debugger, USB Powered \"", Farnell VPN=2443552, Price=14,628, RS VPN=251-8418

## Free pads (board coordinates)
  round 60 hole 118.11 unplated: 4(0,0) 4(0,3779.53) 4(3779.53,1220) 4(3779.53,0) 4(3779.53,3779.53)
  oval 78.74x70.87 hole 39.37: 5(1850,2775) 6(1850,2675) 7(1850,2580) 7(2405,2180) 7(2405,2295) 7(2405,2415)

## Via types
v1: diameter 25, hole 15, Top Layer to Bottom Layer, 179 vias
v2: diameter 50, hole 28, Top Layer to Bottom Layer, 10 vias
v3: diameter 35, hole 20, Top Layer to Bottom Layer, 7 vias
v4: diameter 40, hole 20, Top Layer to Bottom Layer, 5 vias
v5: diameter 39.37, hole 19.68, Top Layer to Bottom Layer, 4 vias

## Nets (pads, with @x,y where several pads share a name; then routed paths per layer and width w, separated by ;. In a path a pad name is that pad's centre, name@x,y a point inside that pad or via, vN(x,y) a via of type N, cw(c..) or ccw(c..) an arc to the next point about the centre after c; other vN are vias at no path point)
3V3: C5.2 C6.2 C7.2 C14.2 CC1.8 CC2.8 CC3.8 P2.1 R3.1 R5.2 R8.2 RX1.A TX1.A U1.1 U4.8 XMC1.19 XMC1.22 XMC1.59 XMC1.62 | length 9621.7
  Top Layer w30: v3(3095,1720) CC3.8 ; v3(3095,2330) CC2.8 ; v3(3095,2940) CC1.8
  Top Layer w40: RX1.A v1(134,1819.6) TX1.A ; R5.2 89,3396.37 v1(89,3515) 89,3516 154.37,3581.37 R3.1 222.63,3614 XMC1.62@376.09,3614
  Top Layer w60: XMC1.62@376.09,3614 XMC1.62 XMC1.59 573,3614 599,3640 978,3640 1039,3579 1039,3547 1130,3456 1919,3456 2004,3541 2004,3599 2021,3616 XMC1.19@2171,3616
  Bottom Layer w30: v1(134,1819.6) 238.4,1819.6 298.53,1759.47 785.47,1759.47 v1(861,1835)
  Bottom Layer w40: v1(89,3515) -49,3377 -49,1876 7.4,1819.6 v1(134,1819.6) ; XMC1.19 2239,3614 2275,3578 2275,2185 2375,2085 3085,2085 v3@3095,2095 ; v3(3095,1439) v3(3095,1720) v3(3095,2085) v3@3095,2095 ; v3(3095,2940) v3(3095,2330) v3@3095,2095
  Bottom Layer w60: P2.1@1835,3623 1843,3623 1852,3614 XMC1.22
3V3GND: "DC Pluyg1.2" "DC Pluyg1.3" C1.1 C2.1 C3.1 C4.1 C5.1 C6.1 C7.1 C11.1 C12.1 C13.1 C14.1 C21.1 C23.1 C25.1 C26.1 C28.1 C29.1 CC1.5 CC2.5 CC3.5 L1.C L3.C P3.1 P3.2 P3.3 P3.4 P3.5 P3.6 P3.7 P3.8 R1.2 R14.1 R17.1 R19.1 rs1.3 TVS1.3 U1.4 U3.1 U4.5 U5.3 U6.2 U7.3 U8.1 U9.3 U10.1 U11.2 U12.2 U13.2 U14.5 U14.6 U15.5 U15.6 U16.5 U16.6 XMC1.1 XMC1.2 XMC1.3 XMC1.39 XMC1.40 XMC1.41 XMC1.42 XMC1.58 XMC1.63 XMC1.79 XMC1.80 | length 290.5
  Top Layer w30: v2@3130,3090 CC1.5 ; CC3.5 v2@3179.76,1919.76 ; v2@3179.76,1934.76 v2@3180,1935 ; CC2.5 3179.76,2529.76 v2(3180,2530)
  Top Layer w40: R14.1 v3(1659.37,1404.37) v3@1660,1405 ; v3(2250,1405) 2250.63,1404.37 R19.1 ; v2(3119,3087) v2@3124,3087
  other v1: 2975,1085 2875,1330 107,1340 965,1420 1165,1420 2775,1430 1065,1510 270,1525 670,1525 2475,1530 2675,1530 2875,1530 1670,1535 2270,1535 825,1624 970,1625 1170,1625 1370,1625 1570,1625 1970,1625 575,1629 2175,1630 2575,1630 2775,1630 2370,1635 1070,1715 1270,1715 1470,1715 1675,1720 1875,1720 470,1721 893,1722 270,1725 2470,1735 2670,1735 1175,1820 1375,1820 1575,1820 575,1830 1975,1830 2375,1830 2570,1835 2970,1835 2769,1856 875,1920 1075,1920 1275,1920 1475,1920 1875,1920 275,1930 675,1930 1675,1930 2475,1930 2675,1930 2870,1935 1037,1992 575,2030 1175,2030 1375,2030 1575,2030 2370,2035 2570,2035 2770,2035 1975,2040 873,2106 1075,2120 1275,2120 1475,2120 1675,2120 1875,2120 275,2130 2670,2135 2880,2140 975,2220 1175,2220 1375,2220 1575,2220 1975,2220 575,2230 2570,2236.03 2770,2236.03 631,2304 875,2320 1075,2320 1275,2320 1475,2320 1875,2320 2475,2355 2675,2355 2885,2355 181,2356 2980,2425 575,2430 775,2430 975,2430 1175,2430 1375,2430 1575,2430 2725,2470 2525,2475 3005,2525 275,2530 875,2530 1075,2530 1275,2530 1475,2530 2335,2590 3185,2620 575,2630 975,2630 1175,2630 1375,2630 779,2651 240,2655 2945,2670 275,2730 675,2730 875,2730 1075,2730 1275,2730 2335,2735 3150,2800 575,2830 775,2830 975,2830 1175,2830 2500,2910 2775,2915 275,2930 675,2930 875,2930 1075,2930 1675,2930 1875,2930 247,3030 575,3030 775,3030 975,3030 1575,3030 1775,3030 675,3130 1075,3130 1675,3130 1875,3130 247,3222 575,3230 1575,3230 1775,3230 1075,3330 1675,3330 1875,3330 270,3335 570,3435 270,3535
  other v2: 3180,1920
5V: "DC Pluyg1.1" C1.2 C2.2 C3.2 C21.2 C26.2 C29.2 P2.8 U3.3 U9.6 U11.1 U12.1 U13.1 U14.8 U15.8 U16.8 XMC1.20 XMC1.21 XMC1.60 XMC1.61 | length 8998.9
  Top Layer w25: v2(2540,2590) U9.6
  Top Layer w60: v2(265,1190) 115,1190 -1,1306 -1,3534 180,3715 1022,3715 1107,3630 P2.8 1136,3592 1195,3533 1877,3533 1927,3583 1927,3668 1974,3715 XMC1.20@2173.91,3715
  Bottom Layer w40: XMC1.20@2173.91,3719 2291,3719 2335,3675 2335,2925 2505,2755 2505,2610 2525,2590 v2(2540,2590)
  Bottom Layer w60: v2(265,1190) 635,1190 655.59,1210.59 U12.1 1019.41,1210.59 1040,1190 v4(1245,1190) 1585,1190 1610,1215 1743.78,1215 U13.1 1994.41,1215.59 2020,1190 v4(2270,1190) 2585,1190 2605.59,1210.59 U11.1
5V2: C8.2 C9.2 C10.2 P1.8 R4.1 U1.8 | length 792.5
  Top Layer w40: P1.8 3310,775 3375,840 3375,1360 3400,1385 U1.8
CAN_H: CAN_H1.1 P1.1 R2.1 U1.7 U2.2 | length 1293.5
  Top Layer w20: R2.1 3544.37,459.37 3660,575 P1.1
  Top Layer w30: U1.7 3550,1285 3735,1100 3735,880.35 U2.2 3727.4,670.28 P1.1
  Top Layer w40: R2.1 3595,309.37 CAN_H1.1
CAN_L: CAN_L1.1 P1.2 R2.2 U1.6 U2.1 | length 1172.5
  Top Layer w20: R2.2 3465.63,440.63 3610,585 P1.2
  Top Layer w30: U1.6 3575,1185 3645,1115 3645,880.35 U2.1 3652.6,745.47 P1.2
  Top Layer w40: CAN_L1.1 3415,309.37 R2.2
DRX_D: R12.2 U4.1 XMC1.49 | length 1227.1
  Top Layer w20: R12.2 187,2443 210,2466 270,2466 331,2527 331,2544 351,2564 426.09,2564 480.54,2618.46 542,2557 542,2320 650,2212 792,2212 826,2178 U4.1
DTX_D: R9.2 R11.1 U4.4 XMC1.73 | length 926
  Top Layer w20: R9.2 277.37,2400.37 319.54,2442.54 319.54,2457.46 392.09,2530 430.95,2491.13 430.95,2191.05 458,2164 572,2164 591,2145 R11.1 646.63,2102.37 676,2073 U4.4
  other v1: 589,2143.5
Gnd1: C15.1 C16.1 U11.3 U14.4 | length 859.6
  Top Layer w30: C16.1 2252.4,797.4 2285,830 v2@2445,830 ; v2(2450,830) 2475,805 U14.4@2475,765 ; U11.3 2825,935 2860,900 C15.1
  Bottom Layer w30: v2(2450,830) 2725,830 2770,875 U11.3
Gnd2: C17.1 C18.1 U12.3 U15.4 | length 801.3
  Top Layer w30: C18.1 242.4,797.4 275,830 v2@435,830 ; U15.4 455,810 ; U12.3 805,935 845,895 C17.1
  Bottom Layer w30: v2(440,830) 715,830 760,875 U12.3
Gnd3: C19.1 C20.1 U13.3 U16.4 | length 863.7
  Top Layer w30: C19.1 1222.4,797.4 1255,830 v2@1415,830 ; v2(1420,830) 1445,805 U16.4 ; U13.3 1825,940 1844.37,920.63 C20.1
  Bottom Layer w30: v2(1420,830) 1695,830 1740,875 U13.3@1740,935
iabc_0: CC2.7 P2.6 pad.7@2405,2295 XMC1.34 | length 2905.8
  Top Layer w20: XMC1.34@2085,2430 2085,2405 2126,2364 2266,2364 2335,2295 pad.7@2405,2295
  Top Layer w30: pad.7@2405,2295 2885,2295 2970,2380 CC2.7
  Bottom Layer w30: P2.6 1336,3556 1305,3525 1305,2921 1796,2430 XMC1.34@2085,2430
iabc_1: CC1.7 P2.5 pad.7@2405,2415 XMC1.33 | length 3168.6
  Top Layer w20: XMC1.33@2085,2530 2085,2503 2123.53,2464.47 2285.53,2464.47 2335,2415 pad.7@2405,2415
  Top Layer w30: pad.7@2405,2415 2770,2415 3050,2695 3050,2955.55 3084.45,2990 CC1.7
  Bottom Layer w30: P2.5 1436,3554 1352,3470 1352,2948 1795,2505 1940,2505 1948,2513 XMC1.33@2068,2513
iabc_2: CC3.7 P2.7 pad.7@2405,2180 XMC1.36 | length 3189.5
  Top Layer w20: XMC1.36@2085,2230 2085,2203 2123.53,2164.47 2333.47,2164.47 2349,2180 pad.7@2405,2180
  Top Layer w30: pad.7@2405,2180 2760,2180 3095,1845 3095,1790 3115,1770 CC3.7
  Bottom Layer w30: P2.7 1236,3567 1258,3545 1258,2893 1771,2380 1880,2380 2030,2230 2057.91,2230 XMC1.36
NetC11_2: C11.2 C12.2 C13.2 R5.1 R6.2 U3.2 U3.4 | length 107.7
  Top Layer w40: R5.1 86,3227.6 C11.2
NetCC1_1: CC1.1 CC1.2 P4.2
NetCC1_3: CC1.3 CC1.4 P4.1
NetCC2_1: CC2.1 CC2.2 P5.2
NetCC2_3: CC2.3 CC2.4 P5.1
NetCC3_1: CC3.1 CC3.2 P8.2
NetCC3_3: CC3.3 CC3.4 P8.1
NetL1_A: L1.A R3.2 | length 89.1
  Top Layer w40: L1.A 190,3416.4 R3.2
NetL2_A: L2.A R4.2 | length 96.7
  Top Layer w40: R4.2 3235,507.6 L2.A
NetL3_A: L3.A R6.1 | length 101.8
  Top Layer w40: R6.1 173.03,2537.63 L3.A
NetP6_1: P6.1 U8.3 | length 751.7
  Top Layer w50: U8.3 2945,3150 3130,3335 3130,3450 3323.43,3643.43 P6.1
NetP6_2: P6.2 U8.4 | length 370.2
  Top Layer w50: U8.4 2970,3465 2970,3485 3126.57,3641.57 P6.2
NetP7_1: P7.1 U10.3 | length 675.1
  Top Layer w50: U10.3 2680,3190 2815,3325 2815,3580 2873.43,3638.43 P7.1
NetP7_2: P7.2 U10.4 | length 296.4
  Top Layer w50: P7.2 2676.57,3443.43 U10.4
NetP9_1: P9.1 R42.1 | length 147.2
  Top Layer w40: R42.1@2349.37,60 P9.1
NetP9_2: P9.2 R27.1 | length 172.2
  Top Layer w40: P9.2 R27.1@2865.63,60
NetP10_1: P10.1 R47.1 | length 157.3
  Top Layer w40: R47.1 P10.1
NetP10_2: P10.2 R32.1 | length 184.7
  Top Layer w40: P10.2 R32.1
NetP11_1: P11.1 R52.1 | length 147.2
  Top Layer w40: R52.1 P11.1
NetP11_2: P11.2 R37.1 | length 172.2
  Top Layer w40: P11.2 R37.1
NetR7_1: R7.1 TX1.C | length 97.1
  Top Layer w20: R7.1 189,1896.4 TX1.C
NetR7_2: R7.2 U5.2 | length 84.4
  Top Layer w20: U5.2 154.76,2103.61 R7.2
NetR8_1: R8.1 U4.2 U4.3 U6.3
NetR9_1: R9.1 U5.1 | length 160.3
  Top Layer w20: U5.1 179.4,2214.4 248,2283 R9.1
NetR10_1: R10.1 RX1.C | length 96.6
  Top Layer w20: RX1.C 81,1895.4 R10.1
NetR10_2: R10.2 U7.2 | length 216.1
  Top Layer w20: U7.2 66.76,2159.24 81,2145 R10.2
NetR11_2: R11.2 U6.1 | length 201.5
  Top Layer w20: R11.2 v1(783,2145) ; v1(863,2152.5) 923.66,2152.5 U6.1
  Bottom Layer w20: v1(783,2145) 816,2145 823.5,2152.5 v1(863,2152.5)
NetR12_1: R12.1 U7.1
NetR16_1: R16.1 U9.5 | length 341.2
  Top Layer w25: U9.5 2800,2540 2860,2600 R16.1
NetR16_2: R16.2 U8.2 | length 146.3
  Top Layer w25: R16.2 2860,2790 2910,2840 U8.2
NetR20_1: R20.1 U9.7 | length 168.4
  Top Layer w25: U9.7 2739.37,2640 R20.1
NetR20_2: R20.2 U10.2 | length 148.4
  Top Layer w25: U10.2 2715,2840 2770,2785 R20.2
NetR21_1: R21.1 U14.7 | length 233.3
  Top Layer w30: U14.7 2370,1230 2410,1270 2485,1270 2509.64,1294.64 R21.1
NetR22_1: R22.1 U15.7 | length 143.9
  Top Layer w30: R22.1 325,1280 355,1250 U15.7
NetR23_1: R23.1 U16.7 | length 152.2
  Top Layer w30: R23.1 1295,1290 1345,1240 U16.7
NetR27_2: R27.2 R28.1 | length 124.5
  Top Layer w40: R27.2@2944.37,60 2960,75.63 R28.1@2960,178.03
NetR28_2: R28.2 R29.1 | length 118.3
  Top Layer w40: R29.1 2911.77,305 R28.2@2958.39,258.39
NetR29_2: R29.2 R30.1 | length 135
  Top Layer w40: R29.2@2765.63,305 R30.1@2765.63,440
NetR30_2: R30.2 R31.1 | length 93.7
  Top Layer w40: R30.2@2865,460.63 R31.1@2865,554.37
NetR32_2: R32.2 R33.1 | length 136.4
  Top Layer w40: R33.1 949.86,61.97 R32.2
NetR33_2: R33.2 R34.1 | length 113.2
  Top Layer w40: R34.1 919.23,305 R33.2
NetR34_2: R34.2 R35.1 | length 143.9
  Top Layer w40: R34.2 R35.1
NetR35_2: R35.2 R36.1 | length 117.1
  Top Layer w40: R35.2 R36.1
NetR37_2: R37.2 R38.1 | length 136.4
  Top Layer w40: R38.1 1921.77,66.97 R37.2
NetR38_2: R38.2 R39.1 | length 110.7
  Top Layer w40: R39.1 1891.14,310 R38.2
NetR39_2: R39.2 R40.1 | length 135
  Top Layer w40: R39.2 R40.1
NetR40_2: R40.2 R41.1 | length 135
  Top Layer w40: R40.2 R41.1
NetR42_2: R42.2 R43.1 | length 135
  Top Layer w40: R42.2@2255.63,60 R43.1@2255.63,195
NetR43_2: R43.2 R44.1 | length 93.3
  Top Layer w40: R43.2@2270,274.37 2280,274.37 2310.63,305 R44.1
NetR44_2: R44.2 R45.1 | length 135
  Top Layer w40: R44.2@2444.37,305 R45.1@2444.37,440
NetR45_2: R45.2 R46.1 | length 113.1
  Top Layer w40: R45.2@2355,450.63 R46.1@2355,563.74
NetR47_2: R47.2 R48.1 | length 136.4
  Top Layer w40: R47.2 255.49,193.66 R48.1
NetR48_2: R48.2 R49.1 | length 110.9
  Top Layer w40: R48.2 264.37,274.37 295,305 R49.1
NetR49_2: R49.2 R50.1 | length 143.9
  Top Layer w40: R49.2 R50.1
NetR50_2: R50.2 R51.1 | length 117.1
  Top Layer w40: R50.2 R51.1
NetR52_2: R52.2 R53.1 | length 135.9
  Top Layer w40: R53.1 1250,200 R52.2
NetR53_2: R53.2 R54.1 | length 108.3
  Top Layer w40: R53.2 1259.37,279.37 1290,310 R54.1
NetR54_2: R54.2 R55.1 | length 135
  Top Layer w40: R54.2 R55.1
NetR55_2: R55.2 R56.1 | length 135.3
  Top Layer w40: R55.2 1345,579.37 R56.1
NetRA1_1: RA1.1 RAB1.1 rs1.1 TVS1.2 | length 240.1
  Top Layer w30: rs1.1 182,1504 244.98,1566.98 RAB1.1
NetRA1_2: RA1.2 U4.6 | length 311.6
  Top Layer w30: RA1.2 732,1588 785,1641 785,1700 726,1759 U4.6
NetRAB1_2: RAB1.2 RB1.1 rs1.2 TVS1.1 | length 249.2
  Top Layer w30: rs1.2 202.03,1604 287.06,1689.02 RAB1.2
NetRB1_2: RB1.2 U4.7 | length 356.9
  Top Layer w30: RB1.2@666.37,1701 695.37,1672 696.37,1673 v5(732,1673) ; U4.7 776,1766 841,1701 v5(841,1676)
  Bottom Layer w30: v5(732,1673) 824,1673 v5@825,1672
Relay_A: U9.2 XMC1.23 | length 1121.6
  Top Layer w20: XMC1.23@2085,3530 2085,3507 2128,3464 2246,3464
  Top Layer w25: 2246,3464 2295,3415 2295,2700 2355,2640 U9.2
Relay_B: U9.4 XMC1.24 | length 1146.9
  Top Layer w20: XMC1.24@2085,3430 2085,3399 2120.47,3363.53 2203.53,3363.53 2205,3365
  Top Layer w25: 2205,3365 2233,3365 2255,3343 2255,2595 2310,2540 U9.4
RX_CAN: C4.2 U1.2 XMC1.75 | length 3462.4
  Top Layer w20: C4.2 771.6,2380 v5(827,2380) v5@826.53,2379.53 ; v2(2839,1754) 2839,1490 3044,1285 U1.2
  Bottom Layer w20: XMC1.75@392.09,2330 427.09,2365 459.96,2365 460.48,2364.47 811.47,2364.47 v5@826.53,2379.53 ; v5(827,2380) 1122,2380 1676,1826 1844.57,1826 1950.57,1720 2237.43,1720 2284.93,1767.5 2754.5,1767.5 2768,1754 v2(2839,1754)
Shield: C8.1 C9.1 C10.1 L2.C P1.3 P1.6 P1.7 P1.S1 P1.S2 U1.5 U2.3
  other v1: 3155,415 3390,455 3590,455 3790,455 3710,530 3155,565 3790,655 3155,730 3590,855 3790,855 3300,885 3490,955 3690,1025 3590,1055 3790,1055 3820,1105 3675,1250 3820,1350 3820,1430
TX_CAN: R1.1 U1.3 XMC1.47 | length 3466.7
  Top Layer w20: R1.1 773.63,2486 v5(827,2486) ; v2(2790,1800) 2790,1739.36 2807.5,1721.86 2807.5,1479.07 2998,1288.57 2998,1238 3051,1185 U1.3
  Bottom Layer w20: XMC1.47@492.09,2430 548.09,2486 v5(827,2486) ; v5@827,2487 1057.43,2487 1686.43,1858 1855,1858 1962,1751 2226,1751 2272.5,1797.5 2764,1797.5
vabc_0: P2.2 pad.5 R15.1 R17.2 XMC1.10 | length 4034.2
  Top Layer w20: pad.5@1850,2779.53 1865.53,2764 2130,2764 2164,2730 XMC1.10@2185,2730
  Top Layer w30: R15.1 R17.2 675.63,1325.63 915,1565 1600,1565 1725,1690 1725,2705 1795,2775 pad.5
  Bottom Layer w30: P2.2 1736,3578 1503,3345 1503,3025 1753,2775 pad.5
vabc_1: P2.3 pad.6 R13.1 R14.2 XMC1.9 | length 3242
  Top Layer w20: pad.6@1850,2679.53 1865.53,2664 2130,2664 2164,2630 XMC1.9@2185,2630
  Top Layer w30: R13.1 R14.2 1695.63,1325.63 1765,1395 1765,2640 1800,2675 pad.6
  Bottom Layer w30: P2.3 1636,3570 1454,3388 1454,2999 1778,2675 pad.6
vabc_2: P2.4 pad.7@1850,2580 R18.1 R19.2 XMC1.8 | length 3474.3
  Top Layer w20: pad.7@1850,2579.53 1865.53,2564 2130,2564 2164,2530 XMC1.8@2185,2530
  Top Layer w30: pad.7@1850,2580 1850,2579.53 1805,2534.53 1805,1510 1930,1385 2130,1385 2180,1335 2290,1335 2294.37,1330.63 2294.37,1310 R19.2 R18.1
  Bottom Layer w30: P2.4 1536,3548 1402,3414 1402,2972 1794,2580 pad.7@1850,2580
Vamp1: C22.1 R24.1 R31.2 U14.3 | length 550.4
  Top Layer w25: U14.3 2420,720 2445,695 2495,695 2525,725 2615,725 2635,705 2635,655.63 R24.1@2632.4,653.03
  Top Layer w40: C22.1@2647.4,575 R24.1@2647.4,658.03 ; C22.1@2652.4,580 R31.2@2775.63,580
Vamp2: C22.2 R24.2 R46.2 U14.2 | length 442
  Top Layer w25: U14.2 2370,695 2449.37,615.63 2449.37,580 R46.2@2449.37,566.07
  Top Layer w40: R46.2@2419.81,580 2449.37,580 C22.2@2546.97,580 ; C22.2@2548.04,578.93 R24.2@2548.04,661.96
Vamp12: C24.1 R25.1 R36.2 U15.3 | length 581.7
  Top Layer w25: U15.3 405,715 430,690 490,690 515,715 625,715 640,700 640,650.63 R25.1 R25.1@637.4,648.03
  Top Layer w40: R25.1@637.4,648.03 C24.1 769.56,565 R36.2
Vamp13: C27.1 R26.1 R41.2 U16.3 | length 550.4
  Top Layer w25: U16.3@1395,775 U16.3 1395,730 1420,705 1470,705 1500,735 1590,735 1610,715 1610,665.63 R26.1@1607.4,663.03
  Top Layer w40: C27.1@1611.77,580 R26.1@1611.77,663.03 ; C27.1 R41.2@1740,585
Vamp22: C24.2 R25.2 R51.2 U15.2 | length 442
  Top Layer w25: U15.2 355,695 434.37,615.63 R51.2
  Top Layer w40: R51.2 C24.2@561.53,566.07 ; C24.2 R25.2@562.6,648.03
Vamp23: C27.2 R26.2 R56.2 U16.2 | length 442
  Top Layer w25: U16.2 1345,695 1424.37,615.63 1424.37,585 R56.2@1424.37,566.07
  Top Layer w40: R56.2@1414.81,585 1424.37,585 C27.2 ; C27.2@1543.04,583.93 R26.2@1543.04,666.96
Vdd1: C15.2 C16.2 U11.4 U14.1 | length 718.2
  Top Layer w30: C16.2 v4(2307.6,722.6) 2315,730 U14.1@2315,765 ; U11.4 2835.59,710.59 2860,735 C15.2
  Bottom Layer w30: v4(2307.6,722.6) 2757.99,722.6 U11.4
Vdd2: C17.2 C18.2 U12.4 U15.1 | length 730.2
  Top Layer w30: C18.2 v4(297.6,722.6) 305,730 U15.1 ; U12.4 815.59,710.59 845,740 C17.2
  Bottom Layer w30: v4(297.6,722.6) 747.99,722.6 U12.4
Vdd3: C19.2 C20.2 U13.4 U16.1 | length 747.7
  Top Layer w30: C19.2 v4(1277.6,722.6) 1295,740 U16.1 ; U13.4 1820.59,715.59 1844.37,739.37 C20.2
  Bottom Layer w30: v4(1277.6,722.6) 1727.99,722.6 U13.4@1740,710.59
Vout1: C28.2 R13.2 R23.2 | length 193.3
  Top Layer w30: R23.2 R13.2
Vout2: C25.2 R15.2 R22.2 | length 193.3
  Top Layer w40: R22.2 R15.2
Vout3: C23.2 R18.2 R21.2 | length 201.6
  Top Layer w30: R18.2 2413.2,1400.99 C23.2
pads on no net: CC1.6 CC2.6 CC3.6 P1.4 P1.5 P1.MH1 P1.MH2 U9.1 U9.8 XMC1.4 XMC1.5 XMC1.6 XMC1.7 XMC1.11 XMC1.12 XMC1.13 XMC1.14 XMC1.15 XMC1.16 XMC1.17 XMC1.18 XMC1.25 XMC1.26 XMC1.27 XMC1.28 XMC1.29 XMC1.30 XMC1.31 XMC1.32 XMC1.35 XMC1.37 XMC1.38 XMC1.43 XMC1.44 XMC1.45 XMC1.46 XMC1.48 XMC1.50 XMC1.51 XMC1.52 XMC1.53 XMC1.54 XMC1.55 XMC1.56 XMC1.57 XMC1.64 XMC1.65 XMC1.66 XMC1.67 XMC1.68 XMC1.69 XMC1.70 XMC1.71 XMC1.72 XMC1.74 XMC1.76 XMC1.77 XMC1.78

## Polygon pours and split planes (outlines as drawn)
Shield on Top Layer "Top Layer-No Net 1" (solid, pour order 16): 3180,70 3795,70 3850,125 3850,1440 3815,1475 3355,1475 3325,1445 3325,975 3280,930 3195,930 3130,865 3130,125
3V3GND on Top Layer "Top Layer-No Net" (solid, remove dead copper, pour order 12): 145,1075 -25,1245 -25,3580 180,3785 2345,3785 2400,3730 2400,3110 2544,2966 2946,2966 3104,3124 3220,3124 3220,2976.92 3220,1123.24 3174.87,1075
Shield on Bottom Layer "Top Layer-No Net 1" (solid, pour order 20): 3180,70 3795,70 3850,125 3850,1440 3815,1475 3355,1475 3325,1445 3325,975 3280,930 3195,930 3130,865 3130,125
3V3GND on Bottom Layer "Top Layer-No Net" (solid, remove dead copper, pour order 14): 145,1075 -25,1245 -25,3580 180,3785 2345,3785 2400,3730 2400,3110 2543,2967 2946,2966 3104.5,3124.5 3220,3124.5 3220,2976.92 3220,1126.66 3171.68,1075

## Other copper
Top Layer:
  rectangle net 5V: 170,1160 310,1220
  rectangle net 5V: 1160,1160 1295,1220
  rectangle net 5V: 2165,1160 2320,1220
  rectangle net 5V2: 3205,650 3350,790
  rectangle net 5V2: 3415,1340 3700,1440
  rectangle net 3V3: 3050,1375 3165,1735
  rectangle net NetR12_1: 40,2343 92,2473
  rectangle net NetRAB1_2: 335,1660 614,1698
  rectangle net NetRA1_1: 339,1559 618,1597
  region net NetCC1_1: 3375,3000 3365,2990 3365,2845 3410,2800 3750,2800 3800,2850 3800,2985 3760,3025 3535,3025 3505,2995 3440,2995 3435,3000
  region net NetCC1_3: 3375,3030 3365,3040 3365,3190 3405,3230 3760,3230 3800,3190 3800,3110 3760,3070 3505,3070 3465,3030
  region net NetCC2_3: 3375,2420 3365,2430 3365,2580 3405,2620 3760,2620 3800,2580 3800,2500 3760,2460 3505,2460 3465,2420
  region net NetCC2_1: 3375,2395 3365,2385 3365,2240 3410,2195 3750,2195 3800,2245 3800,2380 3760,2420 3535,2420 3505,2390 3440,2390 3435,2395
  region net NetCC3_3: 3375,1808.43 3365,1818.43 3365,1968.43 3405,2008.42 3760,2008.43 3800,1968.43 3800,1888.43 3760,1848.43 3505,1848.42 3465,1808.43
  region net NetCC3_1: 3375,1783.43 3365,1773.42 3365,1628.43 3410,1583.43 3750,1583.43 3800,1633.43 3800,1768.43 3760,1808.43 3535,1808.43 3505,1778.43 3440,1778.43 3435,1783.42
  region net 5V: 762,3164 762,3323 803,3364 962,3364 1011,3315 1011,3164
  region net NetR8_1: 712,2065 723,2076 723,2077 781,2077 790,2068 790,1973 800,1963 847,1963 907,2023 976,2023 1003,2050 1003,2113 1033,2113 1033,2048 976,1991 907,1991 858,1942 721,1942 712,1951
  region net 3V3: 825,1866 869,1866 913,1910 913,1949 972,1949 972,1900 946,1874 946,1803 825,1803
  region net NetC11_2: 102,2589 102,2644 139,2681 192,2681 192,2734 191,2735 191,2880 147,2924 147,2988 128,3007 129,3008 129,3194 124,3199 75,3199 70,3194 71,3193 71,2992 102,2961 101,2960 101,2917 56,2872 56,2655 45,2644 45,2590
Bottom Layer:
  region net 5V: 1166,3665 1168,3663 1168,3579 1117,3528 1117,3442 997,3322 997,3293 958,3254 791,3254 769,3276 769,3339 807,3377 972,3377 1069,3474 1069,3548 1104,3583 1104,3655 1114,3665

## Silkscreen, mask and mechanical layers (free items; w line width, h text height)
Top Overlay:
  text "GND" at -41,1657.71 h35 r45
  text "B" at -41,1557.71 h35 r45
  text "A" at -41,1457.71 h35 r45
  text "RS485" at -14.83,1369.75 h45
  text "measurement REV1.0 / v.morais@fe.up.pt" at -22,1139 h40 r270
  text "TOP" at 3440,-30 h30
Bottom Overlay:
  text "GND" at 15,1717 h35 r45
  text "B" at 10,1612.71 h35 r45
  text "A" at 10,1512.71 h35 r45
  text "RS485" at 250,1378 h45
  text "BOT" at 3595,-30 h30